# Altium PCB STM8L Remote PCB.PcbDoc
Units mil, origin at the board's own origin, x right, y up, seen from the top; angles counter-clockwise.
Board outline 1032 x 786.91 mil, 2 copper layers (Top Layer, Bottom Layer); 13 components, 43 nets, 103 pads, 20 vias.
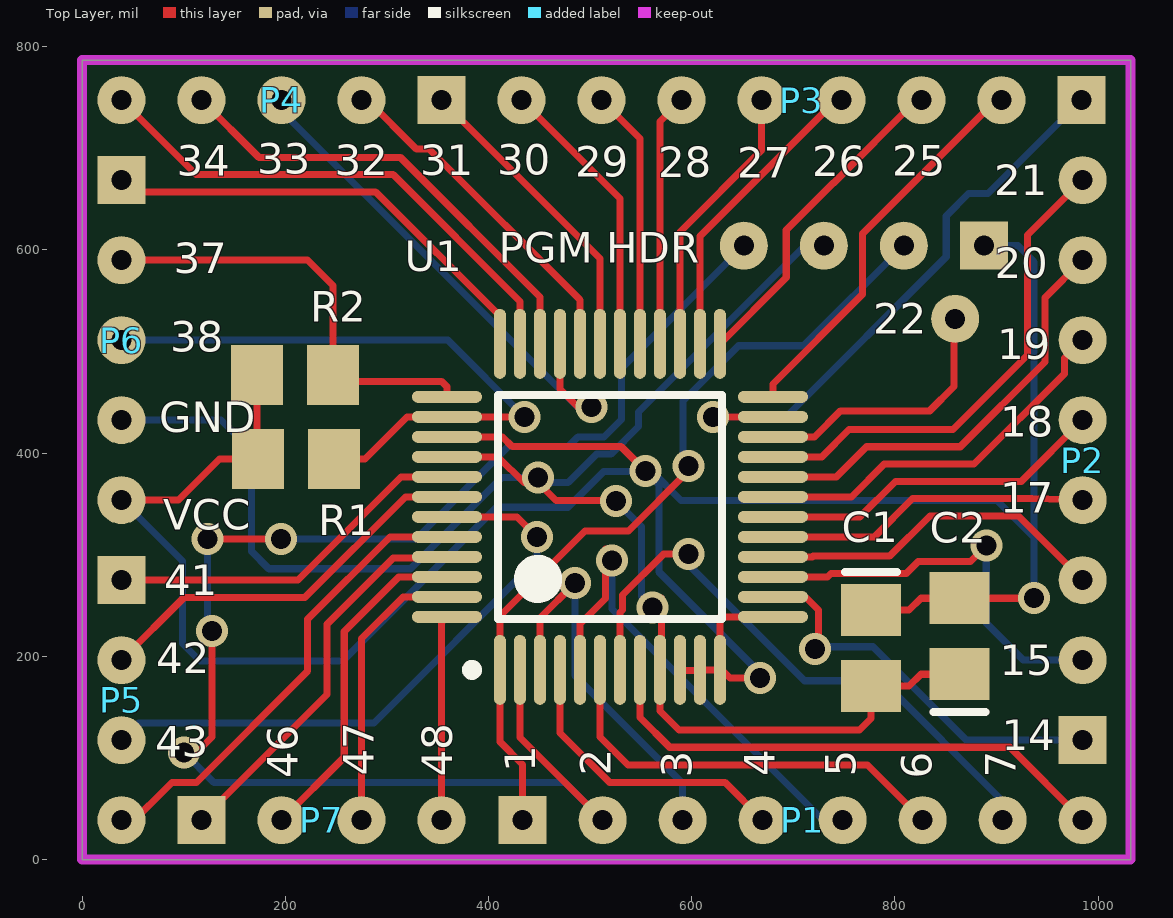
[diagram p0: Top Layer view]
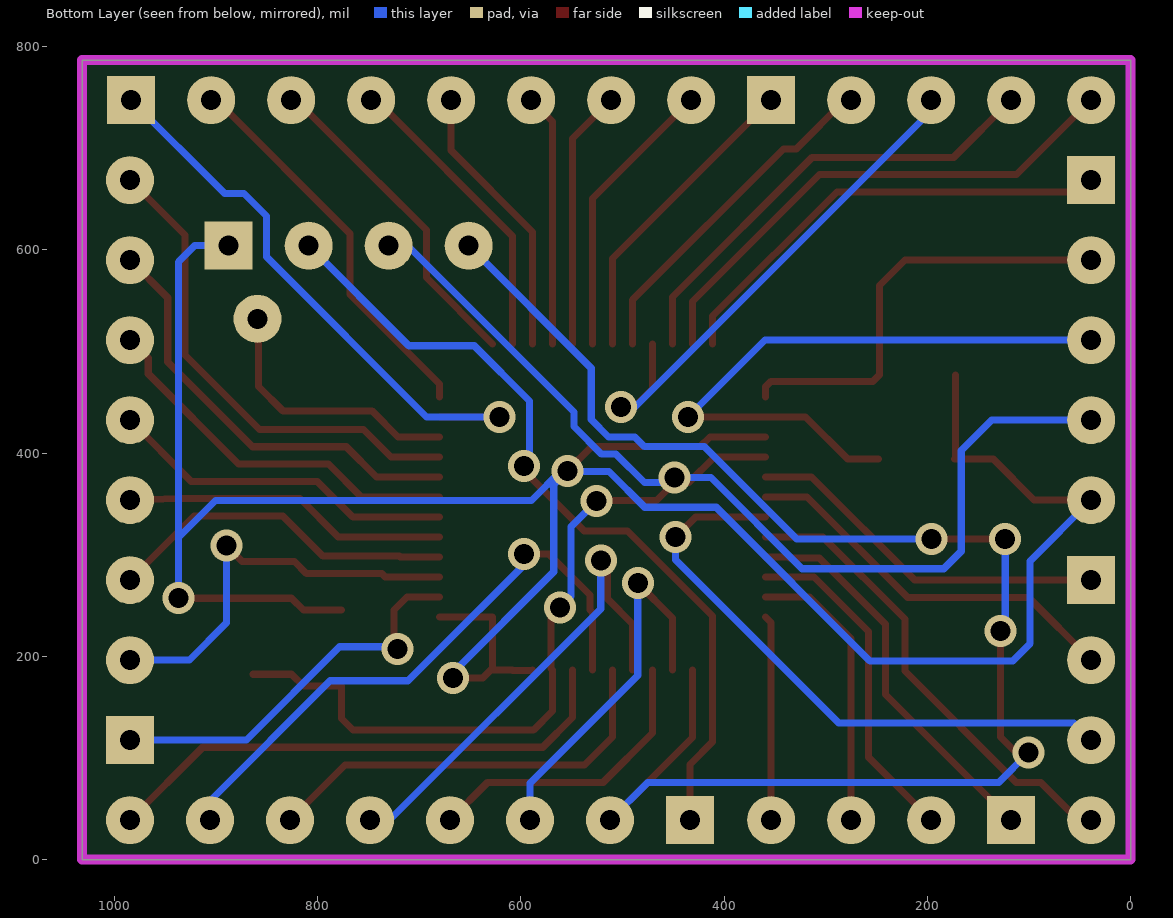
[diagram p1: Bottom Layer view, seen from below]

## Layer stack, top to bottom
Top Solder: solder mask 0.4, Solder Resist, Dk 3.5
Top Layer: signal copper 1.4
Dielectric 1: dielectric 12.6, FR-4, Dk 4.8
Bottom Layer: signal copper 1.4
Bottom Solder: solder mask 0.4, Solder Resist, Dk 3.5

## Board outline
0,0 0,786.91 1032,786.91 1032,0 0,0

## Design rules (kind name [scope] priority, off if disabled: settings)
Clearance [All] p1: gap=10 except(7: Arc-SMDPad SMDPad-SMDPad Track-SMDPad; 20: Poly-Poly SMDPad-Poly Track-Poly Via-Poly Arc-Poly THPad-Poly Fill-Poly)
PolygonConnect [All] p1: connectstyle=Relief reliefconductorwidth=10 reliefentries=4 polygonreliefangle="90 Angle" airgapwidth=10
RoomDefinition "STM8L Remote Schematic" [InComponentClass('STM8L Remote Schematic')] p1: confinementstyle=ConfineIn formatcopy=TRUE lockcomponents=FALSE outline 0,0 1032,0 1032,786.91 0,786.91
RoutingVias [All] p1: holewidth=19.68 width=31.5 viastyle="Through Hole" minholewidth=19.68 minwidth=31.5 maxholewidth=19.68 maxwidth=31.5
SolderMaskExpansion [All] p1: expansion=4
UnpouredPolygon [All] p1: allowunpoured=FALSE
Width [All] p1: maxlimit=10 minlimit=7 preferedwidth=7
29 further rules are at their usual default settings.

## Components (designator, comment, footprint, x,y, rotation, side; value= is the part's Value field where it differs from the comment)
C1 "0.1uF" 0805 776.6,208.09 r270 top
C2 "0.1uF" 0805 863.6,219.84 r90 top
P1 "Header 8" "HEADER 8 W/O BORDER" 433.64,38.87 r0 top
P2 "Header 8" "HEADER 8 W/O BORDER" 984.82,117.61 r90 top
P3 "Header 8" "HEADER 8 W/O BORDER" 983.75,747.53 r180 top
P4 "Header 5" "HEADER 5 W/O BORDER" 353.83,747.53 r180 top
P5 "Header 4" "HEADER 4 W/O BORDER" 38.87,275.09 r270 top
P6 "Header 5" "HEADER 5 W/O BORDER" 38.87,668.79 r270 top
P7 "Header 4" "HEADER 4 W/O BORDER" 117.6,38.87 r0 top
"PGM HDR" "Header 4" "HEADER 4 W/O BORDER" 887.68,604.22 r180 top
R1 "1K" ERA-0805 210.6,394.09 r180 top
R2 "1K" ERA-0805 209.6,477.09 r180 top
U1 "STM8L052C6T6" STM8L052C6-SQFP50P900X900X1600-48N 519.6,347.09 r90 top

## Footprints (in the part's own frame and the unit in brackets; to place one, negate y for a bottom-side part, rotate by r counter-clockwise, add the part's x,y. Pads: shape width x height; smd on the part's side, far side on the other; paste and mask are expansions set on the pad)
0805 [mm] "Chip Capacitor; Body 2.0 x 1.2 mm (LxW typ)"
  rect 1.3x1.5 smd: 1(-0.95,0) 2(0.95,0)
  silkscreen extent -1.9,-0.65 -1.9,0.65
ERA-0805 [mm] "Chip Resistor; Body 2 x 1.3 mm (LxW typ)"
  rect 1.3x1.5 smd: 1(-0.95,0) 2(0.95,0)
"HEADER 4 W/O BORDER" [mm]
  rect 1.2x1.2 hole 0.5: 1(0,0)
  round 1.2 hole 0.5: 2(2,0) 3(4,0) 4(6,0)
"HEADER 5 W/O BORDER" [mm]
  rect 1.2x1.2 hole 0.5: 1(0,0)
  round 1.2 hole 0.5: 2(2,0) 3(4,0) 4(6,0) 5(8,0)
"HEADER 8 W/O BORDER" [mm]
  rect 1.2x1.2 hole 0.5: 1(0,0)
  round 1.2 hole 0.5: 2(2,0) 3(4,0) 4(6,0) 5(8,0) 6(10,0) 7(12,0) 8(14,0)
STM8L052C6-SQFP50P900X900X1600-48N [mm] "SQFP, 48-Leads, Body 9.2x9.2mm (max), Pitch 0.50mm, IPC Medium Density"
  oval 1.75x0.3 smd: 1(-4.075,2.75) 2(-4.075,2.25) 3(-4.075,1.75) 4(-4.075,1.25) 5(-4.075,0.75) 6(-4.075,0.25) 7(-4.075,-0.25) 8(-4.075,-0.75) 9(-4.075,-1.25) 10(-4.075,-1.75) 11(-4.075,-2.25) 12(-4.075,-2.75) 25(4.075,-2.75) 26(4.075,-2.25) 27(4.075,-1.75) 28(4.075,-1.25) 29(4.075,-0.75) 30(4.075,-0.25) 31(4.075,0.25) 32(4.075,0.75) 33(4.075,1.25) 34(4.075,1.75) 35(4.075,2.25) 36(4.075,2.75)
  oval 0.3x1.75 smd: 13(-2.75,-4.075) 14(-2.25,-4.075) 15(-1.75,-4.075) 16(-1.25,-4.075) 17(-0.75,-4.075) 18(-0.25,-4.075) 19(0.25,-4.075) 20(0.75,-4.075) 21(1.25,-4.075) 22(1.75,-4.075) 23(2.25,-4.075) 24(2.75,-4.075) 37(2.75,4.075) 38(2.25,4.075) 39(1.75,4.075) 40(1.25,4.075) 41(0.75,4.075) 42(0.25,4.075) 43(-0.25,4.075) 44(-0.75,4.075) 45(-1.25,4.075) 46(-1.75,4.075) 47(-2.25,4.075) 48(-2.75,4.075)
  silkscreen extent -4.2,-2.8 2.8,3.57, body extent -3.5,-3.5 3.5,3.5, height 1.6

## Part data
C1 C2: library part C0805, "Ceramic Chip Capacitor - Standard"
R1 R2: library part ERA6Y, "Rectangular Thick Film Chip Resistor, 10 Ohm to 1M Ohm Range, 0.1% and 0.5% Tolerance, 0805 Size, 0.1 W"

## Free pads (board coordinates)
  round 47.24 hole 19.68: x(859.35,532.19)

## Via types
v1: diameter 31.5, hole 19.68, Top Layer to Bottom Layer, 20 vias

## Nets (pads, with @x,y where several pads share a name; then routed paths per layer and width w, separated by ;. In a path a pad name is that pad's centre, name@x,y a point inside that pad or via, vN(x,y) a via of type N, cw(c..) or ccw(c..) an arc to the next point about the centre after c; other vN are vias at no path point)
CC2500_CSN: P3.1 U1.23 | length 574.7
  Top Layer w7: v1(620.88,435.67) U1.23
  Bottom Layer w7: v1(620.88,435.67) 692.89,435.67 850.56,593.34 850.56,633.43 872.53,655.41 891.63,655.41 P3.1
CC2500_GDO0: P1.4 U1.4 | length 297
  Top Layer w7: U1.4 470.38,124.62 519,76 632.72,76 P1.4
CC2500_MISO: P3.8 U1.30 | length 280.1
  Top Layer w7: P3.8 529.44,650.66 U1.30
CC2500_MOSI: P4.1 U1.31 | length 304.6
  Top Layer w7: P4.1 509.75,591.61 U1.31
CC2500_SCK: P3.7 U1.29 | length 255.7
  Top Layer w7: P3.7 549.12,709.72 U1.29
GND: "PGM HDR.3" C1.2 C2.1 P6.4 U1.9 U1.40 | length 1729.1
  Top Layer w7: U1.40 409.53,396.3 434.84,371 v1@449,371 ; v1(449,375.98) v1@449,371 ; v1(525.6,352.73) 515.63,352.73 514.96,353.4 466.6,353.4 v1@449,371 ; v1(561.34,248.18) 570.31,257.14 570.31,188.15 U1.9 568.81,146.19 587.5,127.51 765.18,127.51 776.6,138.92 C1.2 814,170.69 825.75,182.44 C2.1
  Bottom Layer w7: P6.4 136.67,432.57 166.7,402.54 166.7,303.41 183.83,286.27 323.33,286.27 413.04,375.98 v1(449,375.98) ; v1@449,371 478.46,371 506.44,398.98 520.75,398.98 547.84,426.07 547.84,440.38 711.68,604.22 730.2,604.22 ; v1(525.6,352.73) 550.7,327.63 550.7,258.83 v1(561.34,248.18)
PA0: "PGM HDR.2" P1.1 U1.1 | length 806.4
  Top Layer w7: P1.1 433.64,93.57 411.33,115.87 U1.1 411.33,239.69 495.12,323.48 513.48,323.48 537.71,323.48 596.97,382.74 v1(596.97,387.35)
  Bottom Layer w7: v1(596.97,387.35) 591.63,392.68 591.63,451.27 646.02,505.66 710.38,505.66 808.94,604.22
PA2: P1.3 U1.3 | length 376.6
  Top Layer w7: U1.3 450.7,237.7 v1(485,272)
  Bottom Layer w7: v1(485,272) 485,181.24 591.12,75.12 P1.3
PA4: P1.5 U1.5 | length 504.4
  Top Layer w7: U1.5 490.07,232 515.1,257.03 515.1,305.78 521.45,299.43 v1(521.45,294.23)
  Bottom Layer w7: v1(521.45,294.23) 521.45,246.71 729.29,38.87 P1.5
PA5: P1.6 U1.6 | length 417.4
  Top Layer w7: U1.6 509.75,120.69 537.45,93 773.21,93 P1.6
PA6: P1.7 U1.7 | length 604.8
  Top Layer w7: U1.7 529.44,243 532.1,245.66 532.1,260.29 572.36,300.56 v1(596.95,300.56)
  Bottom Layer w7: v1(596.95,300.56) 587.49,300.56 587,300.07 696.29,190.78 711.06,176.02 787.84,176.02 906.08,57.78 P1.7
PA7: P1.8 U1.8 | length 524.3
  Top Layer w7: U1.8 549.12,139.88 578.5,110.51 913.18,110.51 P1.8
PB0: P3.2 U1.24 | length 388.4
  Top Layer w7: U1.24 680.03,468.22 768.13,556.31 768.13,615.9 899.76,747.53 P3.2
PB1: P3.3 U1.25 | length 325.3
  Top Layer w7: U1.25 693.08,572.74 693.08,619.6 739.41,665.93 739.83,665.93 821.43,747.53 P3.3
PB2: P3.4 U1.26 | length 303.1
  Top Layer w7: U1.26 608.18,613.44 738.36,743.62 747.53,743.62 P3.4
PB3: P3.5 U1.27 | length 273.3
  Top Layer w7: U1.27 588.49,617.79 668.79,698.09 P3.5
PB4: P3.6 U1.28 | length 248.8
  Top Layer w7: U1.28 568.81,726.29 P3.6
PC0: P6.2 R2.1 U1.37 | length 433.5
  Top Layer w7: P6.2 221.95,590.05 247,565 R2.1 253.39,470.7 353.89,470.7 359.16,465.43 U1.37
PC1: P6.3 R1.1 U1.38 | length 633
  Top Layer w7: R1.1 278.37,394.09 319.95,435.67 U1.38 435.57,435.67 v1(435.62,435.62)
  Bottom Layer w7: P6.3 359.93,511.31 v1(435.62,435.62)
PC2: P5.1 U1.41 | length 362.3
  Top Layer w7: P5.1 212.46,275.09 313.99,376.62 U1.41
PC3: P5.2 U1.42 | length 386.8
  Top Layer w7: P5.2 100.61,258.09 219.5,258.09 318.34,356.93 U1.42
PC4: P5.3 U1.43 | length 601.6
  Top Layer w7: U1.43 428,337.25 v1(447.76,317.49)
  Bottom Layer w7: P5.3 55.75,134.49 287.24,134.49 447.76,295.01 v1(447.76,317.49)
PC5: P5.4 U1.44 | length 470.8
  Top Layer w7: P5.4 45.07,32.67 88.38,75.99 112.55,75.99 222.09,185.52 222.09,236.63 303.02,317.56 U1.44
PC6: P7.1 U1.45 | length 390
  Top Layer w7: P7.1 241.08,162.35 241.08,231.58 306.33,296.83 335.87,296.83 335.87,297.88 U1.45
PC7: P7.2 U1.46 | length 334.6
  Top Layer w7: P7.2 258.08,100.61 258.08,224.54 311.73,278.19 U1.46
PD0: P2.7 U1.20 | length 430.3
  Top Layer w7: U1.20 742.31,376.62 771.95,406.25 864.38,406.25 947.7,489.57 947.7,552.93 P2.7
PD1: P2.8 U1.21 | length 486.8
  Top Layer w7: U1.21 728,396.3 754.95,423.25 857.34,423.25 930.7,496.61 930.7,614.67 P2.8
PD2: pad.x U1.22 | length 265.9
  Top Layer w7: U1.22 720.95,415.99 746.64,441.67 834.4,441.67 858.17,465.44 858.17,531.01 pad.x
PD4: P4.3 U1.33 | length 540
  Top Layer w7: U1.33 470.38,463 500.32,433.06 501.59,434.33 v1(501.59,445.23)
  Bottom Layer w7: P4.3 196.35,736.92 492.63,440.64 497.23,445.23 v1(501.59,445.23)
PD5: P4.4 U1.34 | length 459.6
  Top Layer w7: P4.4 173.98,691.16 313.26,691.16 450.7,553.72 U1.34
PD6: P4.5 U1.35 | length 516.1
  Top Layer w7: P4.5 112.24,674.16 306.22,674.16 431.01,549.37 U1.35
PD7: P6.1 U1.36 | length 455.3
  Top Layer w7: P6.1 50.5,657.16 289,657.16 411.33,534.83 U1.36
PE0: P2.1 U1.14 | length 403.7
  Top Layer w7: U1.14 712.09,258.51 725,245.6 725,205.24 723.2,205.24 v1(721.41,207.03)
  Bottom Layer w7: v1@716.95,202.57 723.79,209.42 778.49,209.42 870.29,117.61 P2.1
PE1: P2.2 U1.15 | length 408.9
  Top Layer w7: U1.15 733.61,278.19 737,281.58 811.25,281.58 823,293.33 874.33,293.33 v1(890,309)
  Bottom Layer w7: v1(890,309) 890,232.74 926.39,196.35 P2.2
PE2: P2.3 U1.16 | length 347.7
  Top Layer w7: U1.16 718.86,297.88 719.57,298.58 794.82,298.58 834.49,338.25 921.66,338.25 P2.3
PE3: P2.4 U1.17 | length 320.4
  Top Layer w7: U1.17 779.8,317.56 817.49,355.25 934.83,355.25 P2.4
PE4: P2.5 U1.18 | length 344.3
  Top Layer w7: U1.18 765.49,337.25 800.49,372.25 924.5,372.25 P2.5
PE5: P2.6 U1.19 | length 377.7
  Top Layer w7: U1.19 757.19,356.93 789.5,389.25 877.99,389.25 966.88,478.14 966.88,493.37 P2.6
PE6: P7.3 U1.47 | length 279.7
  Top Layer w7: P7.3 275.08,217.5 316.08,258.51 U1.47
PE7: P7.4 U1.48 | length 202.2
  Top Layer w7: P7.4 353.82,233.48 U1.48
PF0: P4.2 U1.32 | length 339.8
  Top Layer w7: P4.2 280.93,747.53 329,699.46 341.53,699.46 490.07,550.92 U1.32
RST: "PGM HDR.4" P1.2 U1.2 | length 1546.4
  Top Layer w7: v1(100.44,105.24) 100.44,92.99 128.06,120.61 v1(128.06,224.77) ; v1(123.34,315.52) v1(195.94,315.52) ; U1.2 431.01,120.23 P1.2
  Bottom Layer w7: v1(100.44,105.24) 129.69,75.99 475.25,75.99 P1.2 ; v1(123.34,315.52) 123.34,229.5 v1(128.06,224.77) ; v1(195.94,315.52) 328.53,315.52 419.39,406.37 478.36,406.37 487.97,415.98 513.71,415.98 530.84,433.11 530.84,483.6 651.46,604.22
VCC: "PGM HDR.1" C1.1 C2.2 P6.5 R1.2 R2.2 U1.10 U1.11 U1.12 U1.13 U1.39 | length 2550.6
  Top Layer w7: P6.5 94.91,353.83 135.17,394.09 R1.2 172.2,395.09 R2.2 ; U1.39 413.89,415.99 423.5,406.37 530.64,406.37 v1(554.37,382.65) ; U1.10 588.49,186 608.18,186 U1.11 U1.12 ; v1(667.04,178.67) 637.66,178.67 628.77,187.56 U1.12 ; U1.13 627.86,238.82 U1.12 ; C1.1 814,245.49 825.75,257.24 C2.2 v1(937,257.24)
  Bottom Layer w7: P6.5 98.81,293.89 98.81,212.66 115.95,195.52 256.62,195.52 407.83,346.73 478.24,346.73 513.48,381.98 553.7,381.98 v1(554.37,382.65) ; v1(667.04,178.67) 667.04,183.84 567.7,283.19 567.7,369.32 v1(554.37,382.65) ; 887.68,604.22 921.09,604.22 937,588.31 937,317 ; v1(937,257.24) 937,317 ; v1(554.37,382.65) 560.3,382.65 589.55,353.4 900.6,353.4 937,317

## Keep-outs
Keep-Out Layer:
  the board outline again, w10

## Silkscreen, mask and mechanical layers (free items; w line width, h text height)
Top Overlay:
  text "33" at 172.41,674.87 h30
  text "30" at 408.74,673.94 h30
  text "34" at 93.33,673.01 h30
  text "32" at 248.7,673.48 h30
  text "31" at 332.91,673.48 h30
  text "26" at 718.56,672.55 h30
  text "25" at 797.65,673.01 h30
  text "29" at 485.49,672.08 h30
  text "28" at 566.9,671.61 h30
  text "27" at 645.06,671.15 h30
  text "21" at 898.01,654.05 h30
  text "37" at 90.07,577.18 h30
  text "20" at 898.26,572.29 h30
  text "22" at 778.93,517.71 h30
  text "38" at 86.81,499.96 h30
  text "19" at 900.8,492.32 h30
  text "GND" at 76.18,420.74 h30
  text "18" at 903.85,415.9 h30
  text "17" at 903.6,341.51 h30
  text "VCC" at 79.89,324.51 h30
  text "41" at 80.77,260.38 h30
  text "42" at 72.86,183.15 h30
  text "15" at 903.09,181.3 h30
  text "14" at 905.11,107.79 h30
  text "43" at 71.92,101.27 h30
  text "1" at 446.2,86.07 h30 r90
  text "47" at 287.32,82.67 h30 r90
  text "48" at 364.54,81.74 h30 r90
  text "2" at 520.47,82.28 h30 r90
  text "4" at 681.95,82.03 h30 r90
  text "3" at 600.19,80.51 h30 r90
  text "5" at 761.67,81.27 h30 r90
  text "7" at 918.82,80.52 h30 r90
  text "46" at 212.42,79.88 h30 r90
  text "6" at 836.32,79.74 h30 r90

## Dimensions
0,0 to 0,786.91 on Top Overlay
0,0 to 1032,0 on Top Overlay